# EAGLE board Manny-Pacman.postroute (EAGLE 7.4.0)
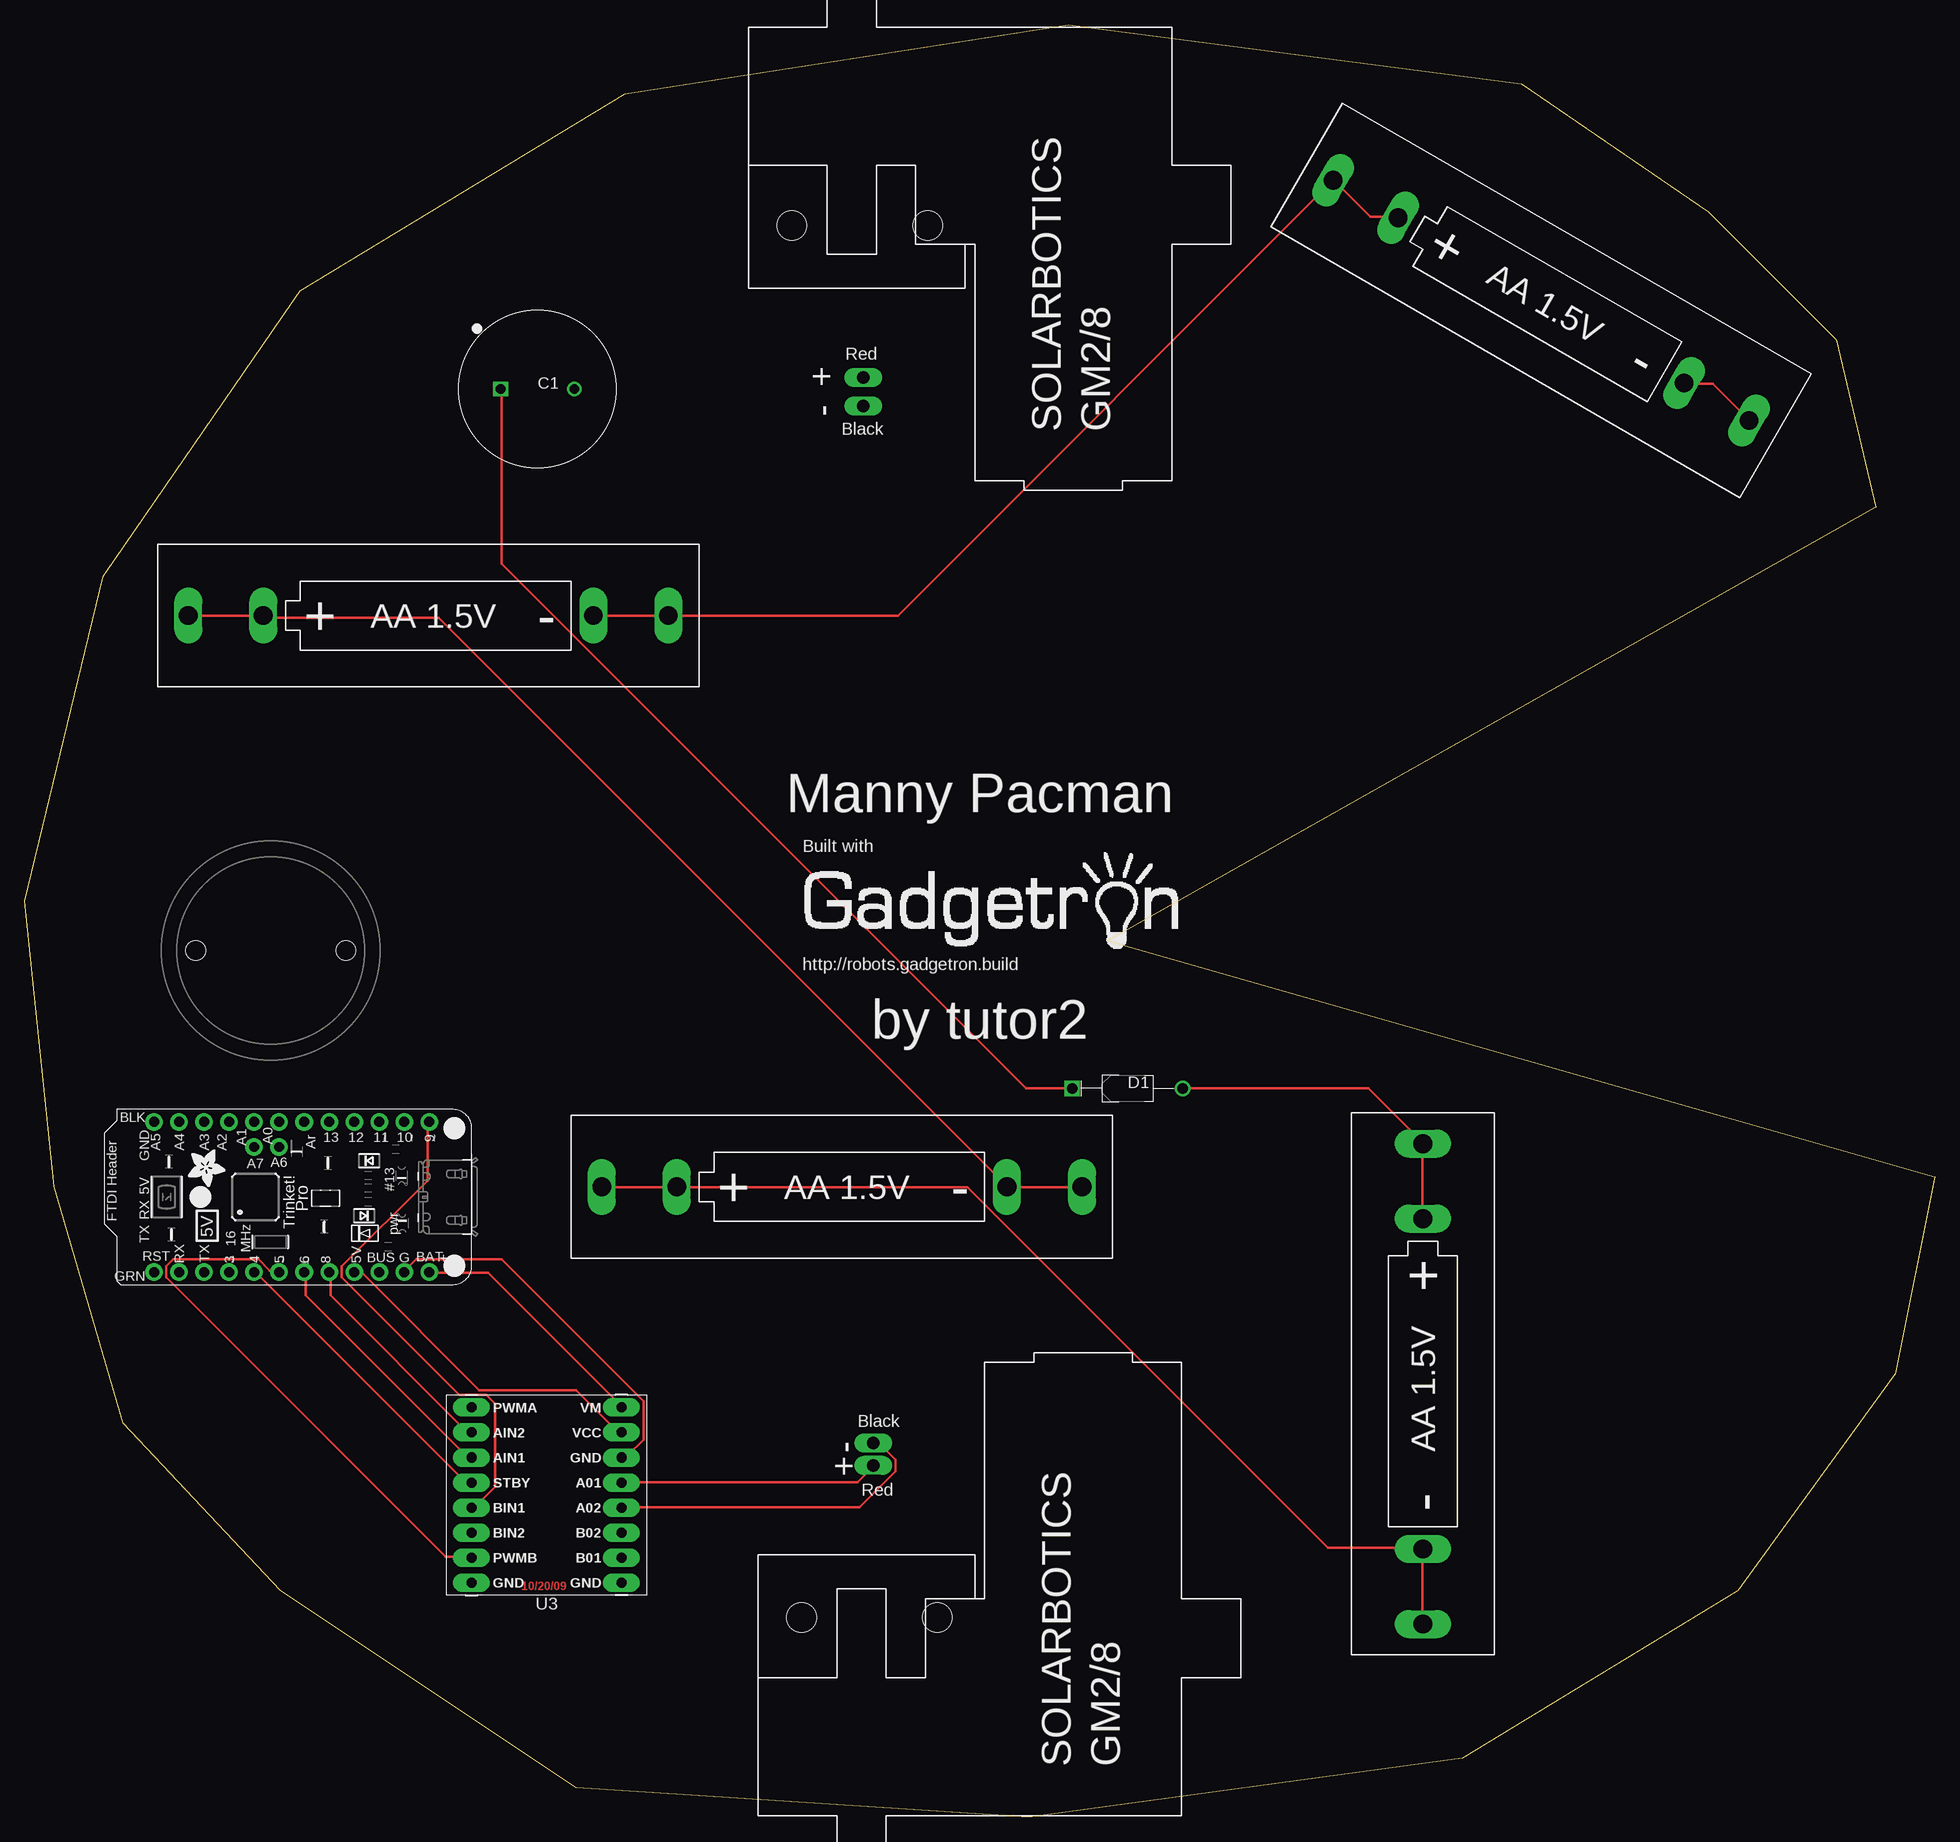
[diagram p0: board, top side]
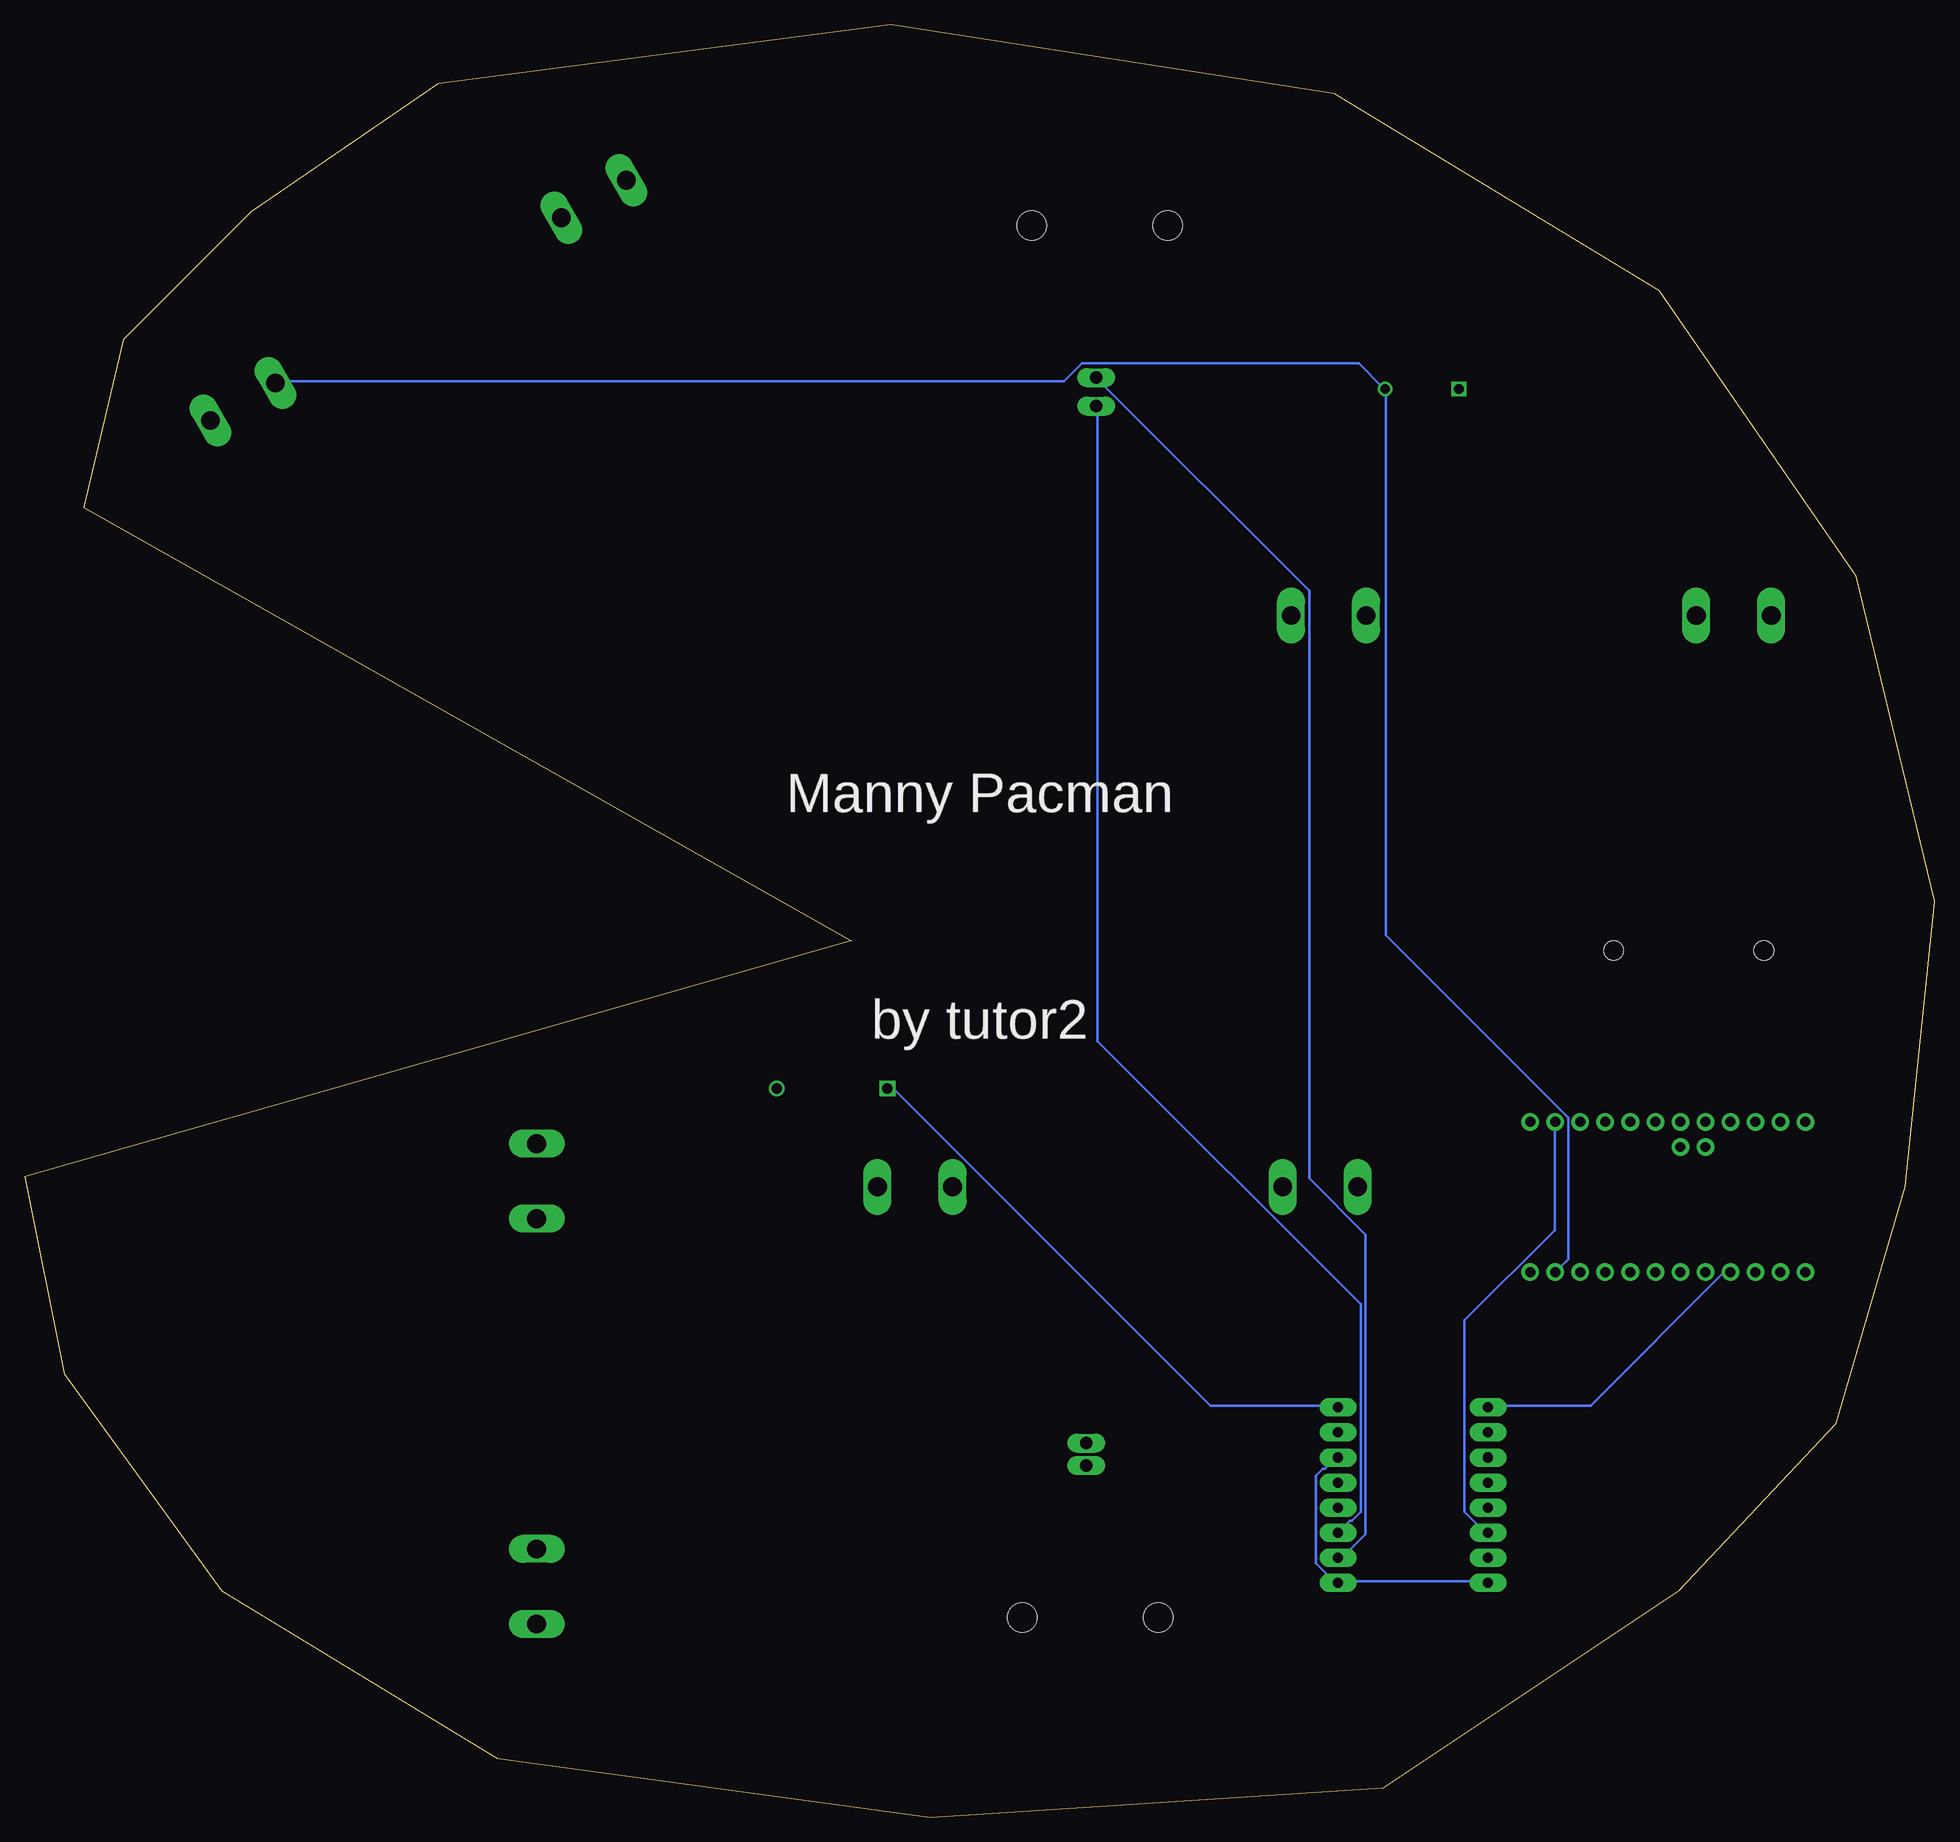
[diagram p1: board, bottom side, seen from below]

Size 194 x 182 mm. Coordinates in mm from the lower left corner, seen from the top.
Outline: 102,0 56,3 26,23 10,40 3,64 0,93 8,126 28,155 61,175 106,182 152,176 171,163 184,150 188,133 110,89 194,65 190,45 174,23 146,6 102,0
Copper layers (1*16): Top 0.035mm / dielectric 1.5mm / Bottom 0.035mm
Design rules "default": minimum track width 10mil, minimum drill 0.6mm, track to track 8mil, track to pad 8mil, pad to pad 8mil, via to via 8mil, smd to smd 8mil, copper to edge 40mil, drill to drill 8mil, minimum pad ring 10mil, minimum via ring 8mil, stop-mask expansion 4mil, vias tented up to drill 0mil, thermal gap 10mil

## Footprints (pad centres in the part's own frame; a part is rotated, then mirrored left to right if it is on the bottom)
BATTERY-AA-BK-92 = drill 1.9 long: N1 16.765,0; N2 24.385,0; P1 -24.385,0; P2 -16.765,0
CAPPRD750W80D1600H2200P = drill 1 pad 1.5 square: 1 -3.75,0 | drill 1 pad 1.5: 2 3.75,0
ADAFRUIT-3/4IN-CASTER = hole 2: -7.62,0; 7.62,0
DIOAD1125W78L520D270_HS = drill 1.06 pad 1.59: A 5.625,0 | drill 1.06 pad 1.59 square: C -5.625,0
SOLARBOTICS_G2_LEFT = drill 1.27 long: + -40.545,-3.68; - -43.45,-3.68 | hole 3: -25.1,-10.2; -25.1,3.6
ADAFRUIT-PRO-TRINKET-5V-NOFTDI = drill 1.016 pad 1.778: +5V 7.62,24.13; A0 -7.62,16.51; A1 -7.62,13.97; A2 -7.62,11.43; A3 -7.62,8.89; A4 -7.62,6.35; A5 -7.62,3.81; AREF -7.62,19.05; D3 7.62,11.43; D4 7.62,13.97; D5 7.62,16.51; D6 7.62,19.05; D8 7.62,21.59; D9 -7.62,31.75; D10 -7.62,29.21; D11 -7.62,26.67; D12 -7.62,24.13; D13 -7.62,21.59; GND2 7.62,29.21; RESET 7.62,3.81; RXD1 7.62,6.35; TXD1 7.62,8.89; VBAT 7.62,31.75; VBUS1 7.62,26.67 | drill 1 pad 1.778: A6 -5.08,16.51; A7 -5.08,13.97
SPARKFUN_DUAL_MOTOR_DRIVER = drill 1.016 pad 1.88 long: A01 7.62,1.27; A02 7.62,-1.27; AIN1 -7.62,3.81; AIN2 -7.62,6.35; B01 7.62,-6.35; B02 7.62,-3.81; BIN1 -7.62,-1.27; BIN2 -7.62,-3.81; GND -7.62,-8.89; GND1 7.62,3.81; GND2 7.62,-8.89; PWMA -7.62,8.89; PWMB -7.62,-6.35; STBY -7.62,1.27; VCC 7.62,6.35; VM 7.62,8.89
SOLARBOTICS_G2 = drill 1.27 long: + 40.545,-3.68; - 42.815,-3.68 | hole 3: 25.1,-10.2; 25.1,3.6

## Placement (x,y rotation side)
BATT1  BATTERY-AA-CLIP  [BATTERY-AA-BK-92]  154,154 330 top
BATT2  BATTERY-AA-CLIP  [BATTERY-AA-BK-92]  142,44 270 top
BATT3  BATTERY-AA-CLIP  [BATTERY-AA-BK-92]  83,64 0 top
BATT4  BATTERY-AA-CLIP  [BATTERY-AA-BK-92]  41,122 0 top
C1  3300uF  [CAPPRD750W80D1600H2200P]  52.08,145 0 top
CASTER1  CASTERADAFRUIT-3/4IN  [ADAFRUIT-3/4IN-CASTER]  25,88 0 top
D1  [DIOAD1125W78L520D270_HS]  112,74 0 top
LOGO  [BUILT_WITH_GADGETRON]  97,91 0 top
U1  SOLARBOTICS_GM2_LEFT  [SOLARBOTICS_G2_LEFT]  81.5,186.71 90 top
U2  ADAFRUIT-PRO-TRINKET-5V-NOFTDI  [ADAFRUIT-PRO-TRINKET-5V-NOFTDI]  9.34,62.97 270 top
U3  SPARKFUN_DUAL_MOTOR_DRIVER-BOB  [SPARKFUN_DUAL_MOTOR_DRIVER]  53,32.71 0 top
U4  SOLARBOTICS_GM2  [SOLARBOTICS_G2]  82.5,-4.83 90 top

## Library data of the parts
BATT1 = Components; DIST: Digikey; DISTPN: BK-92-ND; HIERARCHY_NAME: battery.BATT4; QTY: 2; ROUGH_HEIGHT: 16
BATT2 = Components; DIST: Digikey; DISTPN: BK-92-ND; HIERARCHY_NAME: battery.BATT1; QTY: 2; ROUGH_HEIGHT: 16
BATT3 = Components; DIST: Digikey; DISTPN: BK-92-ND; HIERARCHY_NAME: battery.BATT2; QTY: 2; ROUGH_HEIGHT: 16
BATT4 = Components; DIST: Digikey; DISTPN: BK-92-ND; HIERARCHY_NAME: battery.BATT3; QTY: 2; ROUGH_HEIGHT: 16
C1 = KoalaBuild; DATASHEET: http://industrial.panasonic.com/www-cgi/jvcr13pz.cgi?E+PZ+3+ABA0012+ECA1EM332+7+WW; DATA_SHEET: http://industrial.panasonic.com/www-cgi/jvcr13pz.cgi?E+PZ+3+ABA0012+ECA1EM332+7+WW; DB: /Users/swanson/research/NVSL/src/with-git/gtron_devel/Gadgets/Tools/Koala/Koala/PartLibrary/Digikey/Capacitors-AluminumTH.csv; DEVICE: TH-RADIAL_ALUMINUM_16MM; DIST: Digikey; DISTPN: P5158-ND; HIERARCHY_NAME: drive.C1; IMAGE: http://media.digikey.com/Photos/Panasonic%20Photos/ECA-1CM472.jpg; MFR: Panasonic Electronic Components; MIN_QTY: 1; MPN: ECA-1EM332; PACKAGE: CAPPRD750W80D1600H2200P; PRICE: $1.13; SIZE: TH; STOCK: STOCK; TOL: 20%; VALUE_QUERY: >3000uF; VOLTS: ( >= 5)V
CASTER1 = Components; DIST: Adafruit; DISTPN: 1200; HIERARCHY_NAME: caster.u1; ROUGH_HEIGHT: 6.5
D1 = KoalaBuild; DATASHEET: http://www.st.com/web/en/resource/technical/document/datasheet/CD00001625.pdf; DATA_SHEET: http://www.st.com/web/en/resource/technical/document/datasheet/CD00001625.pdf; DB: /home/buildserver/gtron_devel/Gadgets/Tools/Koala/Koala/PartLibrary/Digikey/Schottky-Diodes-TH.csv; DEVICE: TH-DO-41-AND-DO-204AL; DIST: Digikey; DISTPN: 497-4547-1-ND; HIERARCHY_NAME: battery.D1; IMAGE: http://media.digikey.com/photos/STMicro%20Photos/1N5819.JPG; IRECT: 1A; MFR: STMicroelectronics; MIN_QTY: 1; MPN: 1N5817; PACKAGE: DIOAD1125W78L520D270_HS; PRICE: $0.57; SIZE: TH; STOCK: STOCK; VALUE: 450mV; VREV: 20V
LOGO = Artwork
U1 = Components; DIST: Solarbotics; DISTPN: gm2-assembly; HIERARCHY_NAME: drive.L; ROUGH_HEIGHT: 26
U2 = BOBs; DIST: Adafruit; DISTPN: 2000; HIERARCHY_NAME: brain.U1; ROUGH_HEIGHT: 22
U3 = BOBs; DIST: Sparkfun; DISTPN: 9457-assembly; HIERARCHY_NAME: drive.DRVR; ROUGH_HEIGHT: 15
U4 = Components; DIST: Solarbotics; DISTPN: gm2-assembly; HIERARCHY_NAME: drive.R; ROUGH_HEIGHT: 26

## Nets
+5V_0_BRAIN: U2.+5V U3.VCC
A0_0_BRAIN: U2.A0
A1_0_BRAIN: U2.A1
A01_2_DRIVE: U3.A01 U4.+
A2_0_BRAIN: U2.A2
A02_2_DRIVE: U3.A02 U4.-
A3_0_BRAIN: U2.A3
A4_0_BRAIN: U2.A4
A5_0_BRAIN: U2.A5
A6_0_BRAIN: U2.A6
A7_0_BRAIN: U2.A7
AREF_0_BRAIN: U2.AREF
B01_2_DRIVE: U1.+ U3.B01
B02_2_DRIVE: U1.- U3.B02
D3_0_BRAIN: U2.D3 U3.PWMA
D4_0_BRAIN: U2.D4 U3.STBY
D5_0_BRAIN: U2.D5 U3.PWMB
D6_0_BRAIN: U2.D6 U3.AIN1
D8_0_BRAIN: U2.D8 U3.AIN2
D9_0_BRAIN: U2.D9 U3.BIN1
D10_0_BRAIN: U2.D10 U3.BIN2
D11_0_BRAIN: U2.D11
D12_0_BRAIN: U2.D12
D13_0_BRAIN: U2.D13
GND_0_BRAIN: BATT1.N1 BATT1.N2 C1.2 U2.GND2 U3.GND U3.GND1 U3.GND2
N$1_1_BATTERY: BATT2.N1 BATT2.N2 BATT3.P1 BATT3.P2
N$2_1_BATTERY: BATT3.N1 BATT3.N2 BATT4.P1 BATT4.P2
N$3_1_BATTERY: BATT1.P1 BATT1.P2 BATT4.N1 BATT4.N2
N$4_1_BATTERY: BATT2.P1 BATT2.P2 D1.A
POS_1_BATTERY: C1.1 D1.C U2.VBAT U3.VM
RESET_0_BRAIN: U2.RESET
RXD1_0_BRAIN: U2.RXD1
TXD1_0_BRAIN: U2.TXD1
VBUS1_0_BRAIN: U2.VBUS1

## Tracks (layer width: path | path; a pad name or v marks a point on that pad's centre or on a via)
+5V_0_BRAIN
  Top 0.254: U3.VCC 60.56,39.25 60.11,39.25 55.99,43.37 46.16,43.37 34.28,55.25 33.59,55.25 U2.+5V
A01_2_DRIVE
  Top 0.254: U4.+ 86.17,35.59 84.57,33.99 60.79,33.99 U3.A01
A02_2_DRIVE
  Top 0.254: U4.- 86.4,37.88 86.85,37.88 88.45,36.28 88.45,35.14 84.8,31.48 60.79,31.48 U3.A02
B01_2_DRIVE
  Bottom 0.254: U1.+ 85.03,146.01 63.54,124.52 63.54,64.86 57.82,59.14 57.82,28.74 60.11,26.45 60.56,26.45 U3.B01
B02_2_DRIVE
  Bottom 0.254: U1.- 85.03,143.04 85.03,78.8 58.28,52.05 58.28,31.02 59.19,30.11 59.42,30.11 60.56,28.97 U3.B02
D3_0_BRAIN
  Bottom 0.254: U3.PWMA 45.25,41.77 34.96,41.77 21.47,55.25 20.79,55.25 U2.D3
D4_0_BRAIN
  Top 0.254: U3.STBY 45.25,33.99 44.79,33.99 23.53,55.25 U2.D4
D5_0_BRAIN
  Top 0.254: U3.PWMB 45.25,26.45 42.73,26.45 14.39,54.8 14.39,55.94 15.07,56.63 23.76,56.63 24.9,55.48 25.82,55.48 U2.D5
D6_0_BRAIN
  Top 0.254: U3.AIN1 45.25,36.74 44.79,36.74 28.56,52.97 28.56,55.25 U2.D6
D8_0_BRAIN
  Top 0.254: U3.AIN2 45.25,39.25 44.79,39.25 31.08,52.97 31.08,55.25 U2.D8
D9_0_BRAIN
  Top 0.254: U3.BIN1 45.48,31.25 47.76,33.54 47.76,42 46.85,42.91 44.11,42.91 32.22,54.8 32.22,55.94 40.91,64.63 40.91,70.57 U2.D9
D10_0_BRAIN
  Bottom 0.254: U3.BIN2 45.48,28.74 47.76,31.02 47.76,50.45 38.62,59.6 38.62,70.57 U2.D10
GND_0_BRAIN
  Top 0.254: U3.GND1 60.79,36.74 61.25,36.74 62.85,38.34 62.85,42.23 48.45,56.63 39.76,56.63 38.62,55.48 U2.GND2 | BATT1.N1 168.69,145.55 171.44,145.55 175.09,141.89 BATT1.N2
  Bottom 0.254: U3.GND1 60.79,36.51 61.94,35.37 62.16,35.37 62.85,34.68 62.85,25.77 60.79,23.71 U3.GND2 60.56,23.94 45.48,23.94 U3.GND | U2.GND2 38.39,55.48 37.25,56.63 37.25,71.03 55.76,89.55 55.76,144.87 C1.2 55.99,145.09 58.51,147.61 86.62,147.61 88.45,145.78 168.46,145.78 BATT1.N1
N$1_1_BATTERY
  Top 0.254: BATT3.P1 58.74,63.94 66.05,63.94 BATT3.P2 66.28,63.94 95.77,63.94 132.34,27.37 141.95,27.37 BATT2.N1 141.95,27.14 141.95,19.82 BATT2.N2
N$2_1_BATTERY
  Top 0.254: BATT3.N2 107.2,63.94 99.88,63.94 BATT3.N1 99.66,64.17 42.05,121.78 24.45,121.78 BATT4.P2 24.22,122.01 16.67,122.01 BATT4.P1
N$3_1_BATTERY
  Top 0.254: BATT4.N1 57.82,122.01 65.37,122.01 BATT4.N2 65.59,122.01 88.68,122.01 132.8,166.13 BATT1.P1 133.03,166.13 136.69,162.47 139.43,162.47 BATT1.P2
N$4_1_BATTERY
  Top 0.254: D1.A 136.46,74 141.95,68.51 BATT2.P1 141.95,68.28 141.95,60.97 BATT2.P2
POS_1_BATTERY
  Top 0.254: D1.C 101.71,74 48.45,127.26 48.45,144.87 C1.1 | U3.VM 60.56,41.77 47.08,55.25 41.13,55.25 U2.VBAT
  Bottom 0.254: D1.C 105.83,74 73.59,41.77 60.79,41.77 U3.VM

## Text on the board
tPlace: Manny Pacman | by tutor2
bPlace: Manny Pacman | by tutor2